# Altium PCB PCB_ARRAY_2023-06-20.pcbdoc
Units mil, origin at the board's own origin, x right, y up, seen from the top; angles counter-clockwise.
Board outline 7815 x 4675 mil, 2 copper layers (Top Layer, Bottom Layer); 26 components, 14 nets, 100 pads, 7 vias.
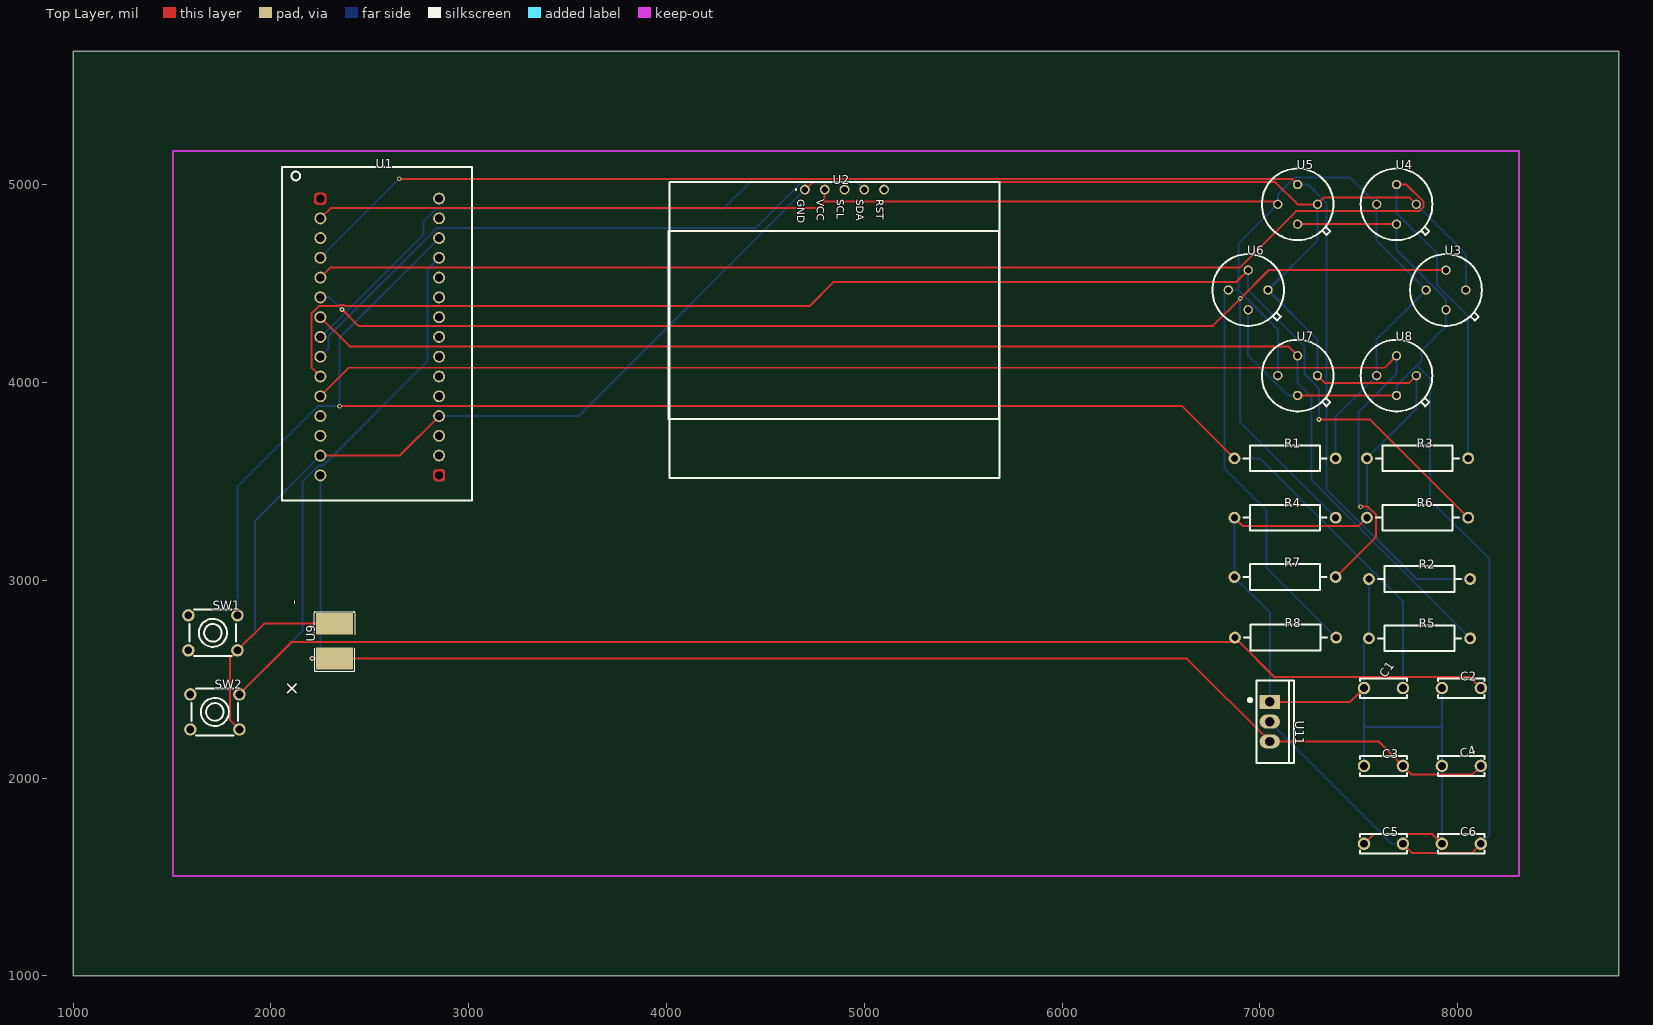
[diagram p0: Top Layer view]
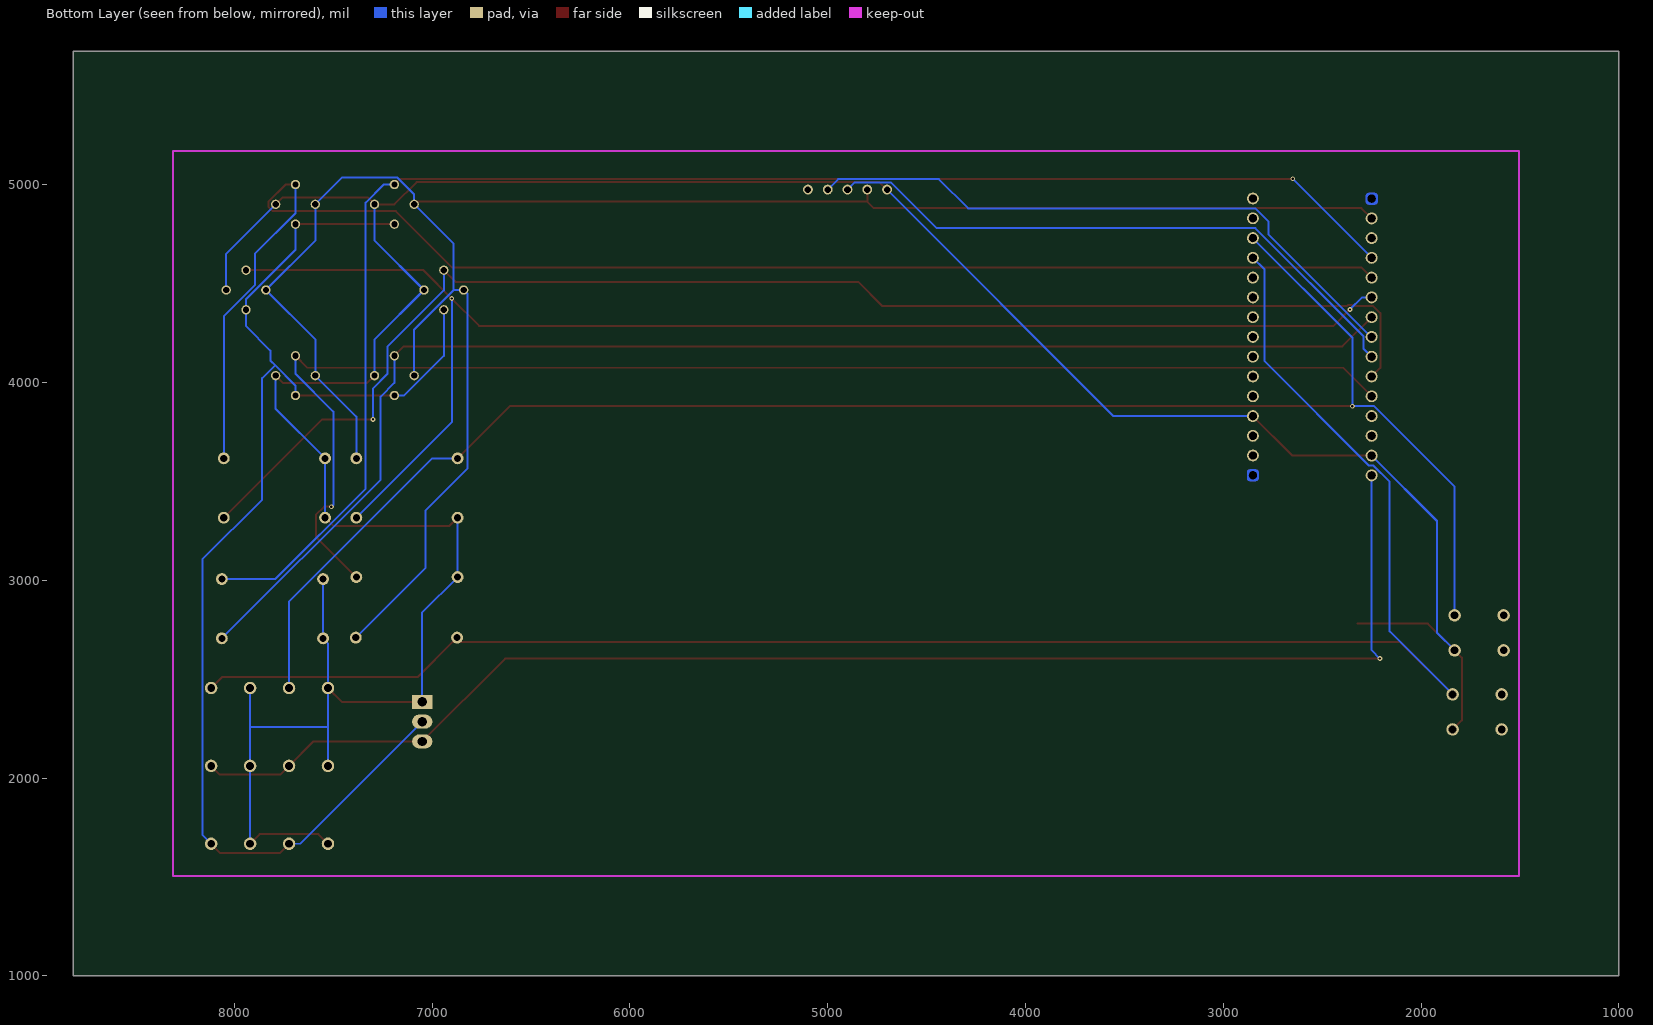
[diagram p1: Bottom Layer view, seen from below]

## Layer stack, top to bottom
Top Layer: signal copper (thickness not stored)
Dielectric: dielectric 12.6, FR-4, Dk 4.8
Bottom Layer: signal copper (thickness not stored)

## Board outline
8815,1000 1000,1000 1000,5675 8815,5675

## Components (designator, comment, footprint, x,y, rotation, side; value= is the part's Value field where it differs from the comment)
C1 "100nF" CAP-TH_L6.0-W2.5-P5.00-D1.0 7625,2455 r0 top
C2 "100nF" CAP-TH_L6.0-W2.5-P5.00-D1.0 8018.7,2455 r0 top
C3 "10uF" CAP-TH_L6.0-W2.5-P5.00-D1.0 7625,2061.3 r0 top
C4 "0.1uF" CAP-TH_L6.0-W2.5-P5.00-D1.0 8018.7,2061.3 r0 top
C5 "10uF" CAP-TH_L6.0-W2.5-P5.00-D1.0 7625,1667.6 r0 top
C6 "0.1uF" CAP-TH_L6.0-W2.5-P5.00-D1.0 8018.7,1667.6 r0 top
R1 "10K" RES-TH_BD3.3-L9.0-P13.00-D0.6 7127.36,3616.13 r0 top
R2 "10K" RES-TH_BD3.3-L9.0-P13.00-D0.6 7807.36,3006.13 r0 top
R3 "10K" RES-TH_BD3.3-L9.0-P13.00-D0.6 7797.36,3616.13 r0 top
R4 "10K" RES-TH_BD3.3-L9.0-P13.00-D0.6 7127.36,3316.13 r0 top
R5 "10K" RES-TH_BD3.3-L9.0-P13.00-D0.6 7807.36,2706.13 r0 top
R6 "10K" RES-TH_BD3.3-L9.0-P13.00-D0.6 7797.36,3316.13 r0 top
R7 "10K" RES-TH_BD3.3-L9.0-P13.00-D0.6 7127.36,3016.13 r0 top
R8 "10K" RES-TH_BD3.3-L9.0-P13.00-D0.6 7130,2710 r0 top
SW1 "6*6*5_C69330" SW-TH_4P-L6.1-W6.1-P4.50-LS6.3 1706.45,2734.07 r0 top
SW2 "6*6*5_C69330" SW-TH_4P-L6.1-W6.1-P4.50-LS6.3 1716.45,2334.07 r0 top
U1 "33BLE" 33BLE 2550,4285 r0 top
U2 "1.54寸OLED" 1.54寸OLED 4850,4275 r0 top
U3 "TGS2600" SENSOR-TH_TGS2600 7940.86,4467.46 r0 top
U4 "TGS2600" SENSOR-TH_TGS2600 7690.86,4900.47 r0 top
U5 "TGS2600" SENSOR-TH_TGS2600 7190.86,4900.47 r0 top
U6 "TGS2600" SENSOR-TH_TGS2600 6940.86,4467.46 r0 top
U7 "TGS2600" SENSOR-TH_TGS2600 7190.86,4034.45 r0 top
U8 "TGS2600" SENSOR-TH_TGS2600 7690.86,4034.45 r0 top
U9 "电池盒" 电池盒 2320.73,2690.17 r90 top
U11 "AMS1117T-5.0" TO-220-3_L10.0-W4.5-P2.54-L 7050,2285 r270 top

## Footprints (in the part's own frame and the unit in brackets; to place one, negate y for a bottom-side part, rotate by r counter-clockwise, add the part's x,y. Pads: shape width x height; smd on the part's side, far side on the other; paste and mask are expansions set on the pad)
1.54寸OLED [mm]
  round 1.26 hole 0.84: 1(-3.81,17.78) 2(-1.27,17.78) 3(1.27,17.78) 4(3.81,17.78) 5(6.35,17.78)
  silkscreen extent -21.34,-19.25 21.2,18.75
33BLE [mil]
  round 0 hole 40 slot 40.2 at 90 deg: 1(-300,644.41) 16(300,-754.4)
  round 60 hole 40 slot 40.2 at 90 deg: 2(-300,544.41) 3(-300,445) 4(-300,345) 5(-300,245) 17(300,-654.4) 18(300,-555) 19(300,-455) 20(300,-355)
  round 60 hole 40 slot 40.2 at 0 deg: 6(-300,145) 7(-300,45) 8(-300,-55) 9(-300,-155) 10(-300,-255) 11(-300,-355) 12(-300,-455) 13(-300,-555) 14(-300,-655) 15(-300,-755) 21(300,-255) 22(300,-155) 23(300,-55) 24(300,45) 25(300,145) 26(300,245) 27(300,345) 28(300,445) 29(300,545) 30(300,645)
  Top Layer region: -285,614.41 -315,614.41 -315,614.41 -322.5,616.42 -327.99,621.91 -330,629.41 -330,629.41 -330,659.41 -330,659.41 -327.99,666.91 -322.5,672.4 -315,674.41 -315,674.41 -285,674.41 -285,674.41 -277.5,672.4 -272.01,666.91 -270,659.41 -270,659.41 -270,629.41 -270,629.41 -272.01,621.91 -277.5,616.42
  Top Layer region: 315.01,-784.41 285.01,-784.41 285.01,-784.41 277.51,-782.39 272.01,-776.91 270.01,-769.41 270.01,-769.41 270.01,-739.41 270.01,-739.41 272.01,-731.91 277.51,-726.41 285.01,-724.41 285.01,-724.41 315.01,-724.41 315.01,-724.41 322.51,-726.41 327.99,-731.91 330.01,-739.41 330.01,-739.41 330.01,-769.41 330.01,-769.41 327.99,-776.91 322.51,-782.39
  Bottom Layer region: -285,614.41 -315,614.41 -315,614.41 -322.5,616.42 -327.99,621.91 -330,629.41 -330,629.41 -330,659.41 -330,659.41 -327.99,666.91 -322.5,672.4 -315,674.41 -315,674.41 -285,674.41 -285,674.41 -277.5,672.4 -272.01,666.91 -270,659.41 -270,659.41 -270,629.41 -270,629.41 -272.01,621.91 -277.5,616.42
  Bottom Layer region: 315.01,-784.41 285.01,-784.41 285.01,-784.41 277.51,-782.39 272.01,-776.91 270.01,-769.41 270.01,-769.41 270.01,-739.41 270.01,-739.41 272.01,-731.91 277.51,-726.41 285.01,-724.41 285.01,-724.41 315.01,-724.41 315.01,-724.41 322.51,-726.41 327.99,-731.91 330.01,-739.41 330.01,-739.41 330.01,-769.41 330.01,-769.41 327.99,-776.91 322.51,-782.39
  silkscreen extent -494,-881 466,804
CAP-TH_L6.0-W2.5-P5.00-D1.0 [mm]
  round 1.6 hole 1: 1(-2.5,0) 2(2.5,0)
  silkscreen extent -3,-1.27 3,1.25
RES-TH_BD3.3-L9.0-P13.00-D0.6 [mil]
  round 60 hole 36: 1(-255.91,0) 2(255.9,0)
  silkscreen extent -210,-65 210,65
SENSOR-TH_TGS2600 [mil]
  round 47.2 hole 31.4: 1(100.22,0) 2(0,100.22) 3(-100.21,0) 4(0,-100.22)
  silkscreen extent -181,-181 181,181
SW-TH_4P-L6.1-W6.1-P4.50-LS6.3 [mm]
  round 1.6 hole 1: 1(-3.15,2.25) 2(3.15,2.25) 3(-3.15,-2.25) 4(3.15,-2.25)
  silkscreen extent -3,-3 3,3
TO-220-3_L10.0-W4.5-P2.54-L [mm]
  rect 1.8x2.6 hole 1.2: 1(-2.54,0.005)
  oval 1.8x2.6 hole 1.2: 2(0,0.005) 3(2.54,-0.005)
  silkscreen extent -5.3,-2.73 5.3,3.09
电池盒 [mil]
  rect 110.11x187.11 smd: 1(-86.1,0) 2(90,0)
  silkscreen extent -150,-103 150,103

## Via types
v1: diameter 24.02, hole 12.01, Top Layer to Bottom Layer, tented both sides, 7 vias

## Nets (pads, with @x,y where several pads share a name; then routed paths per layer and width w, separated by ;. In a path a pad name is that pad's centre, name@x,y a point inside that pad or via, vN(x,y) a via of type N, cw(c..) or ccw(c..) an arc to the next point about the centre after c; other vN are vias at no path point)
3V3: R1.2 R8.2 U1.2 U2.2 U3.3 U4.3 U5.3 U6.3 U7.3 U8.3 | length 10242.4
  Top Layer w10: U1.2 2302.3,4881.71 4767.28,4881.71 4800,4914.43 ; U2.2 4800,4914.43 ; U5.3 7076.68,4914.43 4800,4914.43
  Bottom Layer w10: U7.3 7090.64,4267.57 6890.75,4467.46 ; R1.2 7383.27,3827.08 U8.3 7590.64,4217.46 U3.3 7590.64,4717.46 U4.3 7453.95,5037.16 7177.68,5037.16 7090.64,4950.12 U5.3 6890.75,4700.58 6890.75,4467.46 ; R8.2 7034.69,3061.22 7034.69,3351.39 6822,3564.08 6822,4448.82 U6.3 6890.75,4467.46
+5V: C5.2 C6.2 U3.4 U4.4 U5.4 U6.4 U7.4 U8.4 U11.2 | length 6590.9
  Top Layer w10: U7.4 U8.4 ; U5.4@7190.86,4800.25 U4.4@7690.86,4800.25 ; C5.2 7770.36,1620.67 8070.2,1620.67 C6.2
  Bottom Layer w10: U6.4 6940.86,4134.48 7141.11,3934.23 U7.4 ; U11.2 7667.61,1667.6 C5.2 ; U8.4 7690.86,3984.34 7793.73,4087.21 ; U4.4@7690.86,4800.25 7690.86,4671.92 7940.86,4421.92 U3.4 7940.86,4284.45 7817.46,4161.05 7817.46,4110.94 7793.73,4087.21 ; C6.2 8161.74,1712.21 8161.74,3105.09 7859.28,3407.55 7859.28,4021.65 7793.73,4087.21
GND: C1.1 C2.1 C3.1 C4.1 C5.1 C6.1 R2.1 R3.1 R4.1 R5.1 R6.1 R7.1 SW1.4 SW2.4 U1.14 U1.19 U2.1 U3.1 U4.1 U5.1 U6.1 U7.1 U8.1 U9.2 U11.1 | length 16078.3
  Top Layer w10: SW2.4 1793.97,2291.99 1793.97,2608.99 SW1.4 1965.15,2780.17 U9.2 ; U1.14 2650,3630 U1.19 ; U2.1 4738.25,5013.25 7078.09,5013.25 7190.87,4900.47 U5.1 7326.37,4935.76 7755.79,4935.76 U4.1 ; R4.1@6871.45,3316.13 6914.62,3272.96 7498.29,3272.96 R6.1 ; U11.1 7456.59,2385.01 C1.1 ; U7.1 7329.4,3996.13 7752.76,3996.13 U8.1 ; C5.1 7575.07,1716.09 7871.79,1716.09 C6.1
  Bottom Layer w10: SW1.4 1919.54,2734.56 1919.54,3299.54 U1.14 ; U1.19 3555,3830 U2.1 ; R4.1@6871.45,3316.13 6871.45,3016.13 7050.2,2837.38 U11.1 ; U7.1 7291.08,4217.46 U6.1 7291.08,4717.46 U5.1 ; C3.1 7526.58,2258.15 ; R6.1 R3.1 7791.08,3865.75 U8.1 ; R2.1 R5.1 7526.58,2681.25 C1.1 7526.58,2258.15 ; U4.1 8041.08,4650.47 U3.1 ; C6.1 C4.1 7920.28,2258.15 ; C2.1 7920.28,2258.15 ; 7526.58,2258.15 7920.28,2258.15
R1_1: C1.2 R1.1 SW1.2 U1.28 | length 8617.1
  Top Layer w10: v1(2347.26,3880) 6607.58,3880 R1.1@6871.45,3616.13
  Bottom Layer w10: SW1.2@1830.47,2822.65 1830.47,3473.69 2236.78,3880 v1(2347.26,3880) 2347.26,4227.26 U1.28 ; R1.1@6871.45,3616.13 6999.93,3616.13 7723.42,2892.64 C1.2
S0: R2.2 U1.4 U5.2 | length 7663.7
  Top Layer w10: v1(2649.33,5029.33) 7162.22,5029.33 U5.2
  Bottom Layer w10: U1.4 v1(2649.33,5029.33) ; U5.2 7244.5,5000.69 7336.59,4908.6 7336.59,3462.7 7793.16,3006.13 R2.2
S1: R3.2 U1.5 U4.2 | length 7459
  Top Layer w10: U1.5 2300,4580 6897.26,4580 7182.91,4865.65 7805.28,4865.65 7827.53,4887.9 7827.53,4913.84 7740.68,5000.69 U4.2
  Bottom Layer w10: U4.2 7690.86,4855.53 7896.4,4649.99 7896.4,4491.42 8053.27,4334.55 R3.2
S2: R4.2 U1.6 U3.2 | length 7175.2
  Top Layer w10: v1(2359.55,4368.84) 2442.33,4286.06 6762.11,4286.06 v1(6900.17,4424.12) 7043.73,4567.68 U3.2
  Bottom Layer w10: U1.6 2298.39,4430 v1(2359.55,4368.84) ; v1(6900.17,4424.12) 6900.17,3799.23 R4.2
S3: R5.2 U1.7 U7.2 | length 6811.7
  Top Layer w10: U1.7 2397.47,4182.53 7143,4182.53 U7.2
  Bottom Layer w10: U7.2 7190.86,3998.24 7260.73,3928.37 7260.73,3508.67 R5.2
S4: R6.2 U1.10 U6.2 | length 7030.8
  Top Layer w10: U1.10 2206.28,4073.72 2206.28,4350.17 2242.38,4386.27 2344.37,4386.27 2350,4391.9 2369.11,4391.9 2374.74,4386.27 4722.99,4386.27 4845.29,4508.57 6881.75,4508.57 U6.2 ; v1(7298.66,3813.16) 7556.24,3813.16 R6.2
  Bottom Layer w10: U6.2 6940.86,4465.81 7226.01,4180.66 7226.01,4042.57 7298.66,3969.92 v1(7298.66,3813.16)
S5: R7.2 U1.11 U8.2 | length 6866
  Top Layer w10: U1.11 2394.28,4074.28 7630.47,4074.28 U8.2 ; R7.2 7587.59,3220.45 7587.59,3329.95 7545.93,3371.61 v1(7509.23,3371.61)
  Bottom Layer w10: v1(7509.23,3371.61) 7499.56,3381.28 7499.56,3852.39 7690.86,4043.69 U8.2
SCL: U1.9 U2.3 | length 3066.9
  Bottom Layer w10: U1.9 2291.06,4171.06 2291.06,4233.4 2837.66,4780 4449.3,4780 4681,5011.7 4863.3,5011.7 U2.3
SDA: U1.8 U2.4 | length 3140.9
  Bottom Layer w10: U1.8 2253.33,4230 2772.08,4748.75 2772.08,4814.48 2837.6,4880 4289.91,4880 4437.73,5027.82 4947.18,5027.82 U2.4
U1_27: C2.2 R8.1 SW2.2 U1.27 | length 9151.9
  Top Layer w10: SW2.2@1840.47,2422.65 2106.48,2688.66 6895.44,2688.66 ; R8.1 6895.44,2688.66 ; C2.2 8061.35,2510.78 7073.32,2510.78 6895.44,2688.66
  Bottom Layer w10: SW2.2@1840.47,2422.65 2159.29,2741.47 2159.29,3497.4 2241.89,3580 2263.38,3580 2791.06,4107.68 2791.06,4571.06 U1.27
VIN: C3.2 C4.2 U1.15 U9.1 U11.3 | length 7113.9
  Top Layer w10: v1(2208.13,2604.07) 2216.19,2604.07 2268.46,2604.07 U9.1 6630.74,2604.07 U11.3 7599.73,2185 C3.2 7767.89,2016.84 8072.67,2016.84 C4.2
  Bottom Layer w10: v1(2208.13,2604.07) 2250,2645.94 U1.15
pads on no net: SW1.1 SW1.3 SW2.1 SW2.3 U1.1 U1.3 U1.12 U1.13 U1.16 U1.17 U1.18 U1.20 U1.21 U1.22 U1.23 U1.24 U1.25 U1.26 U1.29 U1.30 U2.5

## Silkscreen, mask and mechanical layers (free items; w line width, h text height)
Top Overlay:
  text "-" at 2155.73,2875.17 h80 r90
  text "+" at 2164.01,2443.45 h80 r135

## Text inside footprints (layer, text, board x,y; h text height)
U2: Top Overlay "GND" at 4660.31,4925 h39.37 r270; Top Overlay "VCC" at 4760.31,4925 h39.37 r270; Top Overlay "SCL" at 4860.31,4925 h39.37 r270; Top Overlay "SDA" at 4960.31,4925 h39.37 r270; Top Overlay "RST" at 5060.31,4925 h39.37 r270